# Altium PCB STM32F0_M95.PcbDoc
Units mil, origin at the board's own origin, x right, y up, seen from the top; angles counter-clockwise.
Board outline 3484 x 4455 mil, 2 copper layers (Top Layer, Bottom Layer); 107 components, 75 nets, 364 pads, 74 vias.
Unrouted connection lines stored in the file: 6.
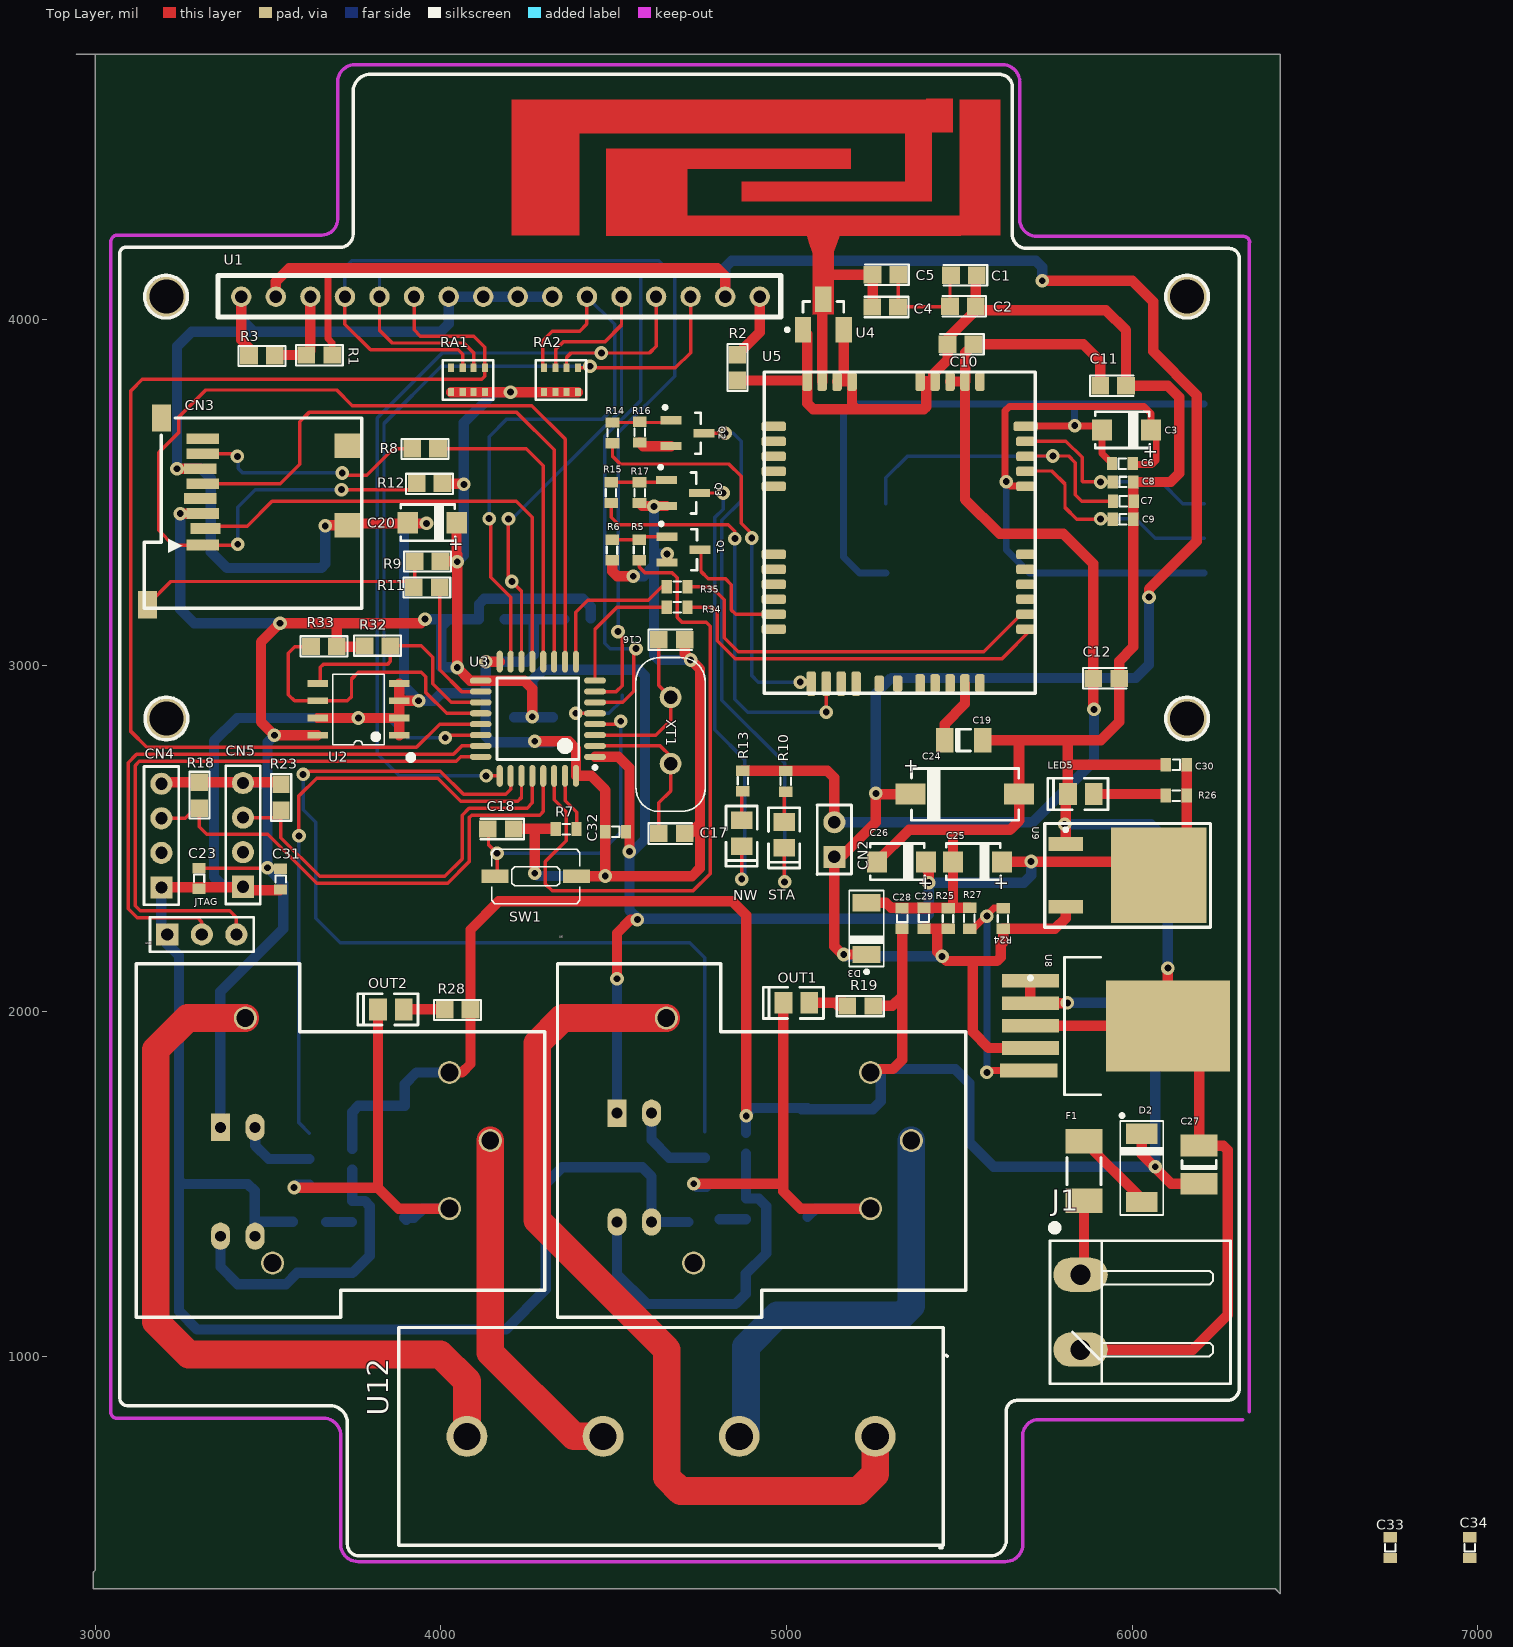
[diagram p0: Top Layer view]
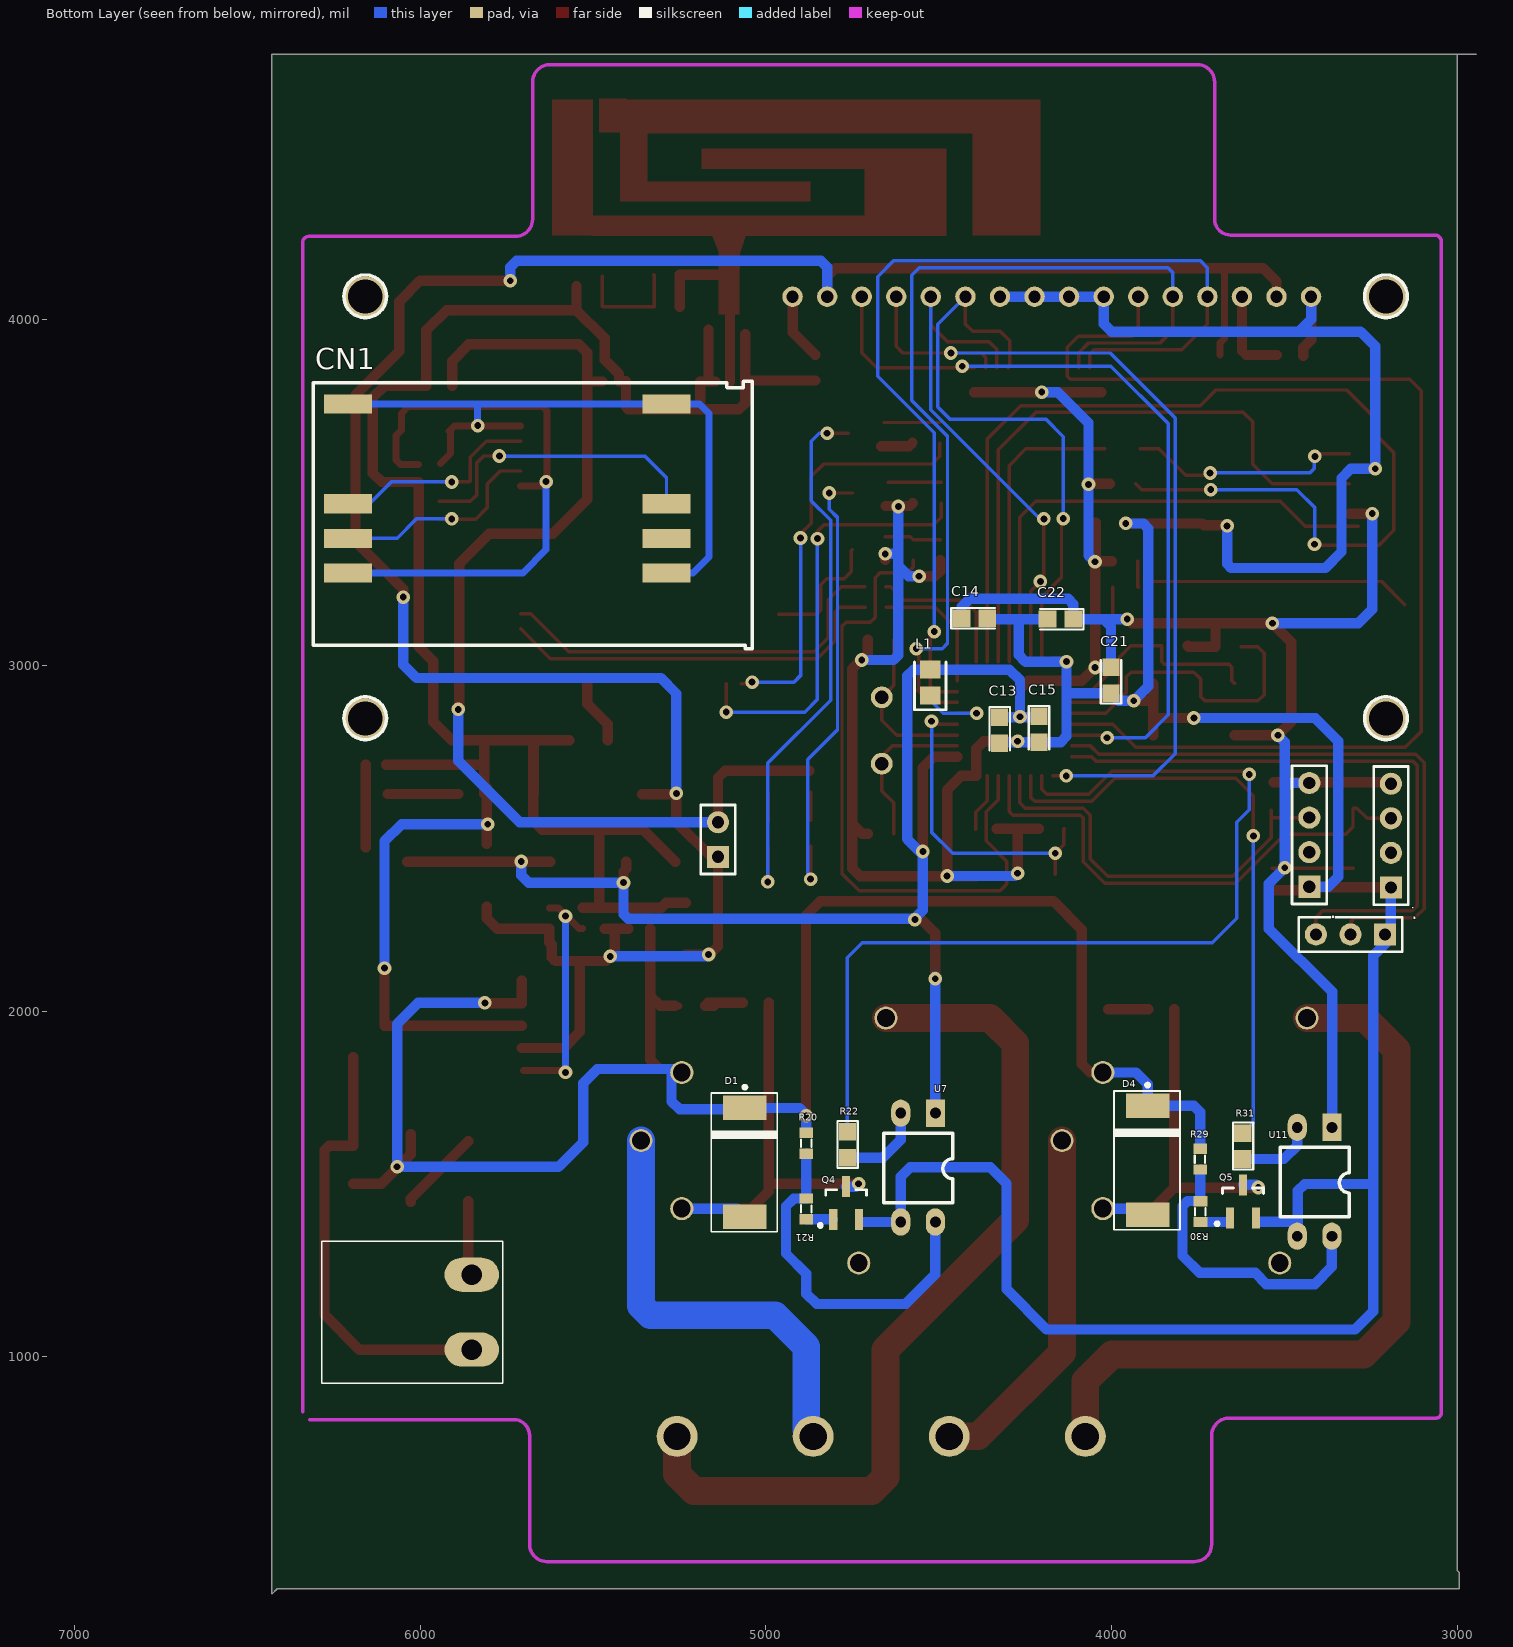
[diagram p1: Bottom Layer view, seen from below]

## Layer stack, top to bottom
Top Layer: signal copper 1.4
Dielectric: dielectric 12.6, FR-4, Dk 4.8
Bottom Layer: signal copper 1.4

## Board outline
3768,4769 2945,4769 3000,4769 3000,423 3000,382 2995,377 2995,329 6414,329 6429,314 6429,699 6429,4769 3773,4769

## Design rules (kind name [scope] priority, off if disabled: settings)
Clearance [All] p1: gap=10
PolygonConnect [All] p1: connectstyle=Relief reliefconductorwidth=10 reliefentries=4 polygonreliefangle="90 Angle"
RoutingVias [All] p1: holewidth=28 width=50 viastyle="Through Hole" minholewidth=28 minwidth=50 maxholewidth=28 maxwidth=50
SilkscreenOverComponentPads [IsPad] p1: minsilkscreentomaskgap=10
SolderMaskExpansion [All] p1: expansion=4
Width "Schematic Width Constraint_9" [InNet('RL_NO0')] p1: maxlimit=90 minlimit=80 preferedwidth=90
Width "Schematic Width Constraint_8" [InNet('RL_CM0')] p2: maxlimit=90 minlimit=80 preferedwidth=90
Width "Schematic Width Constraint_7" [InNet('NetD2_1')] p3: maxlimit=40 minlimit=10 preferedwidth=30
Width "Schematic Width Constraint_6" [InNet('VGSM')] p4: maxlimit=40 minlimit=10 preferedwidth=30
Width "Schematic Width Constraint_5" [InNet('VPP')] p5: maxlimit=40 minlimit=10 preferedwidth=30
Width "Schematic Width Constraint_4" [InNet('VCC')] p6: maxlimit=40 minlimit=10 preferedwidth=30
Width "Schematic Width Constraint_3" [InNet('4V3')] p7: maxlimit=40 minlimit=10 preferedwidth=30
Width "Schematic Width Constraint_2" [InNet('GND')] p8: maxlimit=40 minlimit=10 preferedwidth=30
Width "Schematic Width Constraint_1" [InNet('RL_CM1')] p9: maxlimit=90 minlimit=80 preferedwidth=90
Width "Schematic Width Constraint" [InNet('RL_NO1')] p10: maxlimit=90 minlimit=80 preferedwidth=90
Width [All] p11: maxlimit=30 minlimit=10 preferedwidth=10
27 further rules are at their usual default settings.

## Components (designator, comment, footprint, x,y, rotation, side; value= is the part's Value field where it differs from the comment)
C1 "10p" C2012-0805 5514,4129 r180 top
C2 "33p" C2012-0805 5511,4039 r180 top
C3 "10uF" "Cap SMD Tant 10u" 5984,3681 r180 top
C4 "10p" C2012-0805 5286,4037 r180 top
C5 "33p" C2012-0805 5287,4130 r180 top
C6 "104" C1608-0603 5972,3584 r0 top
C7 "33pF" C1608-0603 5975,3475 r0 top
C8 "33pF" C1608-0603 5974,3531 r0 top
C9 "33pF" C1608-0603 5974,3423 r0 top
C10 "104" C2012-0805 5504,3929 r180 top
C11 "104" C2012-0805 5945,3810 r0 top
C12 "104" C2012-0805 5925,2963 r0 top
C13 "104" C2012-0805 4324,2813 r270 bottom
C14 "104" C2012-0805 4397,3137 r180 bottom
C15 "104" C2012-0805 4210,2816 r270 bottom
C16 "22P" C2012-0805 4668,3075 r0 top
C17 "22P" C2012-0805 4668,2514 r0 top
C18 "104" C2012-0805 4174,2527 r180 top
C19 "2.2uF" C1206 5458,2784 r0 top
C20 "10uF" "Cap SMD Tant 10u" 3975,3413 r180 top
C21 "104" C2012-0805 4002,2957 r90 bottom
C22 "104" C2012-0805 4148,3134 r0 bottom
C23 "104" C1608-0603 3301,2384 r270 top
C24 "10uF" "Cap SMD Tant - 470u" 5516,2628 r0 top
C25 "10uF" "Cap SMD Tant 10u" 5553,2432 r180 top
C26 "10uF" "Cap SMD Tant 10u" 5333,2432 r180 top
C27 "104" C1210 6194,1501 r90 top
C28 "104" C1608-0603 5335,2268 r90 top
C29 "104" C1608-0603 5398,2269 r90 top
C30 "104" C1608-0603 6128,2713 r180 top
C31 "104" C1608-0603 3537,2382 r270 top
C32 "104" C1608-0603 4506,2519 r180 top
C33 "104" C1608-0603 6747,448 r90 top
C34 "104" C1608-0603 6977,448 r90 top
CN1 "Sim Card Holder" "Sim card holder 1" 6209,3268 r0 bottom locked
CN2 "HDR1x2" CON.HDR1X2 5139,2447 r90 top
CN3 "SD Card/MMC" mini_SDCard 3312,3396 r90 top
CN4 "HDR1x4" CON.HDR1X4 3192,2358 r90 top
CN5 "HDR1x4" CON.HDR1X4 3428,2360 r90 top
D1 "FR307" DO-214AB,SMC 5061,1405 r90 bottom
D2 "1N4007" DO-214AA,SMB 6028,1448 r90 top
D3 "Zener" D1208 5232,2314 r270 top
D4 "FR307" DO-214AB,SMC 3896,1411 r90 bottom
F1 "FUSE" FUSE.SMD2010 5861,1451 r90 top
J1 "Domino2" "Domino 2 - Thao roi" 5851,1021 r0 top
JTAG "HDR1x3" CON.HDR1X3 3209,2222 r0 top (schematic designator CN10)
L1 "100uH" L2012-0805 4525,2950.63 r90 bottom
LED5 "LED" LED.SMD0805 5852,2628 r0 top
NW "LED" LED.SMD0805 4871,2515 r90 top (schematic designator LED3)
OUT1 "LED" LED.SMD0805 5029,2024 r0 top (schematic designator LED4)
OUT2 "LED" LED.SMD0805 3856,2005 r0 top (schematic designator LED6)
Q1 "C1815" "SOT23 [C1815]" 4714,3335 r0 top
Q2 "C1815" "SOT23 [C1815]" 4725,3672 r0 top
Q3 "C1815" "SOT23 [C1815]" 4712,3499 r0 top
Q4 "C1815" "SOT23 [C1815]" 4768,1456 r90 bottom
Q5 "C1815" "SOT23 [C1815]" 3620,1461 r90 bottom
R1 "Value" R2012-0805 3649,3898 r180 top
R2 "Value" R2012-0805 4858,3862 r270 top
R3 "Value" R2012-0805 3483,3896 r180 top
R5 "1k" R1608-0603 4574,3334 r90 top
R6 "1k" R1608-0603 4496,3334 r90 top
R7 "10k" R1608-0603 4363,2527 r180 top
R8 "0" R2012-0805 3955,3627 r180 top
R9 "10k" R2012-0805 3962,3301 r180 top
R10 "1k" R1608-0603 4998,2665 r270 top
R11 "1k" R2012-0805 3960,3226 r180 top
R12 "100k" R2012-0805 3968,3526 r180 top
R13 "1k" R1608-0603 4874,2666 r270 top
R14 "1k" R1608-0603 4497,3673 r270 top
R15 "1k" R1608-0603 4493,3500 r90 top
R16 "1k" R1608-0603 4576,3675 r90 top
R17 "1k" R1608-0603 4575,3500 r270 top
R18 "1k" R2012-0805 3302,2625 r270 top
R19 "1k" R2012-0805 5214,2015 r180 top
R20 "10k" R1608-0603 4883,1618 r90 bottom
R21 "10k" R1608-0603 4883,1428 r90 bottom
R22 "220" R2012-0805 4764,1614 r270 bottom
R23 "1k" R2012-0805 3538,2619 r270 top
R24 "120k" R1608-0603 5627,2268 r90 top
R25 "1k" R1608-0603 5468,2268 r90 top
R26 "1k" R1608-0603 6128,2624 r180 top
R27 "51K" R1608-0603 5530,2269 r90 top
R28 "1k" R2012-0805 4049,2004 r180 top
R29 "10k" R1608-0603 3744,1572 r90 bottom
R30 "10k" R1608-0603 3743,1420 r90 bottom
R31 "220" R2012-0805 3620,1610 r270 bottom
R32 "Value" R2012-0805 3817,3057 r0 top
R33 "Value" R2012-0805 3662,3055 r0 top
R34 "22" R1608-0603 4684,3169 r180 top
R35 "22" R1608-0603 4684,3228 r180 top
RA1 "10,100,1K,10K" Res_Array_Chip 4032,3791 r0 top
RA2 "10,100,1K,10K" Res_Array_Chip 4301,3791 r0 top
STA "LED" LED.SMD0805 4994,2510 r90 top (schematic designator LED2)
SW1 "PTS635" TactSwitches.PTS635.SMT 4275,2390 r0 top
U1 "LCD.LCD16x2" "LCD connector" 3423,4067 r0 top locked
U2 "24C04" SOIC8 3880,2798 r180 top
U3 "STM32F030K6T6" QFP80P900X900X245-32N 4281,2846 r180 top
U4 "ANTEN" SOT150P320X110-3N 5107,4015.5 r90 top
U5 "M95" QFN50P400X400X80_HS-15N 4936,2920 r0 top
U6 "RELAY_OMRON_4PIN" PCBComponent_1#1 5519,1114 r90 top locked
U7 "PC817" DIP4 4510,1705 r270 bottom
U8 "MIC29302" DPAK165P1524X238-5N 5614,2167 r270 top
U9 "LM1117-3.3V" TO-252 5802,2393 r270 top
U10 "RELAY_OMRON_4PIN" PCBComponent_1#1 4301,1114 r90 top locked
U11 "PC817" DIP4 3363,1664 r270 bottom
U12 "Component_1" PCBComponent_1#2 5454,455 r90 top
XT1 "8MHz" Crystal.HC49/USxx 4665,2716 r180 top

## Footprints (in the part's own frame and the unit in brackets; to place one, negate y for a bottom-side part, rotate by r counter-clockwise, add the part's x,y. Pads: shape width x height; smd on the part's side, far side on the other; paste and mask are expansions set on the pad)
C1206 [mm] "Chip Capacitor; Body 3.2 x 1.6 mm (LxW typ)"
  rect 1.27x1.8 smd: 1(0,0) 2(2.8,0)
  silkscreen extent 0.87,-0.81 1.9,0.8
C1210 [mm] "Chip Capacitor; Body 3.2 x 2.5 mm (LxW typ)"
  rect 1.6x2.7 smd: 1(0,0) 2(2.8,0)
  silkscreen extent 1.1,-1.25 1.7,1.25
C1608-0603 [mil] "Capacitor Chip 0603 package"
  rect 30x38 smd: 1(-30,0.05) 2(30,0.05)
  silkscreen extent -11,-15 10,15, body extent -28,-17 28,17, height 32
C2012-0805 [mm] "Capacitor Chip 0805 package"
  rect 1.3x1.27 smd: 1(-0.945,-0.007) 2(0.955,-0.007)
  silkscreen extent -1.7,-0.76 1.51,0.75, body extent -0.89,-0.58 0.89,0.58, height 0.79
"Cap SMD Tant 10u" [mm] "CAP TANT 10UF 16V 10% 1210"
  rect 1.5x1.55 smd: 1(-1.8,0) 2(1.8,0)
  silkscreen extent -1.7,-1.4 2.3,1.37, body extent -2.4,-0.91 2.4,0.89, height 1.8
"Cap SMD Tant - 470u" [mm] "CAP TANT 10UF 50V 10% 2917"
  rect 2.2x1.55 smd: 1(-4,0) 2(4,0)
  silkscreen extent -3.91,-1.93 3.96,1.91, body extent -3.76,-1.78 3.84,1.73, height 2.79
CON.HDR1X2 [mil]
  rect 64x64 hole 35.43: 1(-0.44,0.28)
  round 64 hole 35.43: 2(99.56,0.28)
  silkscreen extent -51,-50 150,50, body extent -51,-50 149,50, height 350
CON.HDR1X3 [mil]
  rect 64x64 hole 35.43: 1(0,0)
  round 64 hole 35.43: 2(100,0) 3(200,0)
  silkscreen extent -50,-50 250,50, body extent -50,-50 250,50, height 350
CON.HDR1X4 [mil]
  rect 64x64 hole 35.43: 1(0,0)
  round 64 hole 35.43: 2(100,0) 3(200,0) 4(300,0)
  silkscreen extent -50,-50 350,50, body extent -50,-50 350,50, height 350
Crystal.HC49/USxx [mm] "HC49USxx package"
  rrect100% 1.6x1.6 hole 1: 1(0,0) 2(0,-4.877)
  silkscreen extent -2.55,-7.8 2.55,3.5, body extent -2.29,-7.57 2.3,3.25, height 5.08
D1208 [mil]
  rect 50x80 smd: 1(0,0) 2(150,0)
  silkscreen extent -35,-50 205,50
DIP4 [mm]
  rect 2x1.4 hole 0.8: 1(0,0)
  oval 2x1.4 hole 0.8: 2(0,-2.54) 3(8,-2.54) 4(8,0)
  silkscreen extent 1.48,-3.78 6.57,1.3, body extent -0.17,-3.72 8.19,1.34, height 5.4
DO-214AA,SMB [mm]
  rect 1.5x2.3 smd: 1(0,0) 2(5,0)
  silkscreen extent -0.95,-1.6 6.48,1.57, body extent -0.19,-1.78 5.21,1.82, height 2.3
DO-214AB,SMC [mm]
  rect 1.8x3.2 smd: 1(0,0) 2(8,0)
  silkscreen extent -1.1,-2.39 9.65,2.46, body extent 0.04,-2.97 7.99,2.93, height 2.3
"Domino 2 - Thao roi" [mm]
  oval 4x2.5 hole 1.5: 1(0,5.5) 2(0,0)
  silkscreen extent -2.25,-2.5 11.03,9.2, body extent -1.09,-2.54 11.07,8, height 9
DPAK165P1524X238-5N [mm] "D2-PAK, 5-Pads, Body 8.43x8.39mm (max), IPC Medium Density"
  rect 1x4.2 smd: 1(2,2.336) 2(3.65,2.336) 3(5.3,2.336) 4(6.95,2.336) 5(8.6,2.209)
  rect 6.7x9.1 smd: 3(5.334,12.436)
  silkscreen extent 0.28,2.21 10.38,7.49, body extent 0.31,4.24 10.36,14.91, height 2.38
FUSE.SMD2010 [mm] "2010 Body 5.0 x 2.5 mm (LxW typ)"
  rect 1.8x2.7 smd: 1(0,0) 2(4.4,0)
  silkscreen extent 1.2,-1.25 3.2,1.25
L2012-0805 [mm] "Inductor Chip 0805 package"
  rect 1.3x1.5 smd: 1(-0.945,-0.007) 2(0.955,-0.007)
  silkscreen extent -1.99,-1.16 1.51,1.14, body extent -0.89,-0.58 0.89,0.58, height 0.79
"LCD connector" [mm] "Character LCD 16x2"
  round 1.5 hole 0.9: 1(0,0) 2(2.54,0) 3(5.08,0) 4(7.62,0) 5(10.16,0) 6(12.7,0) 7(15.24,0) 8(17.78,0) 9(20.32,0) 10(22.86,0) 11(25.4,0) 12(27.94,0) 13(30.48,0) 14(33.02,0) 15(35.56,0) 16(38.1,0)
  round 3 hole 2.5 unplated: M1(-5.5,0) M2(69.5,0) M3(-5.5,-31) M4(69.5,-31)
  silkscreen extent -7.1,-32.57 71.07,1.57, body extent -1.27,-1.32 39.37,1.22, height 5.5
LED.SMD0805 [mm]
  rect 1.3x1.6 smd: 1(0.948,0.006) 2(-0.952,0.006)
  silkscreen extent -2.44,-1.14 2,1.16, body extent -1.08,-0.64 1.08,0.64, height 1.14
mini_SDCard [mm]
  rect 0.8x2.4 smd paste+0.127 mask+0.127: 1(-1.21,0) 3(1.1,0) 4(2.2,0.2) 5(3.3,0) 6(4.4,0.2) 7(5.5,0) 8(6.6,0)
  rect 0.8x2.2 smd paste+0.127 mask+0.127: 2(0,-0.2)
  rect 2x1.4 smd paste+0.127 mask+0.127: 9(8.128,3.048) 10(-5.588,4.064)
  rect 1.8x2 smd paste+0.127 mask+0.127: 11(0.254,-10.668) 12(6.096,-10.668)
  silkscreen extent -5.84,-11.68 8.13,4.32, body extent -5.84,-11.63 8.01,4.52, height 1.68
PCBComponent_1#1 [mm]
  round 1.7 hole 1.3: 1(4,20) 2(18,7) 3(8,7) 4(22,22) 5(13,4)
  silkscreen extent 0,0 26,30
PCBComponent_1#2 [mm]
  round 3 hole 2: 1(8,5) 2(8,15) 3(8,25) 4(8,35)
  silkscreen extent 0,0 16,40
QFN50P400X400X80_HS-15N [mm] "QFN, 14-Leads, Body 4.00x4.00mm, Pitch 0.50mm, Thermal Pad 4.00x2.20mm, IPC Medium Density"
  rrect50% 1.8x0.7 smd: 1(0.7,19.6) 2(0.7,18.5) 3(0.7,17.4) 4(0.7,16.3) 5(0.7,15.2) 6(0.7,10.2) 7(0.7,9.1) 8(0.7,8) 9(0.7,6.9) 10(0.7,5.8) 11(0.7,4.7) 31(19.2,19.6)
  rrect50% 0.7x1.8 smd: 12(3.45,0.7) 13(4.55,0.7) 14(5.65,0.7) 15(6.75,0.7)
  rrect50% 0.7x1.4 smd: 16(11.45,0.7) 17(12.55,0.7) 18(13.65,0.7) 19(14.75,0.7) 20(15.85,0.7) 32(15.85,22.9) 33(14.75,22.9) 34(13.65,22.9) 35(12.55,22.9) 36(11.45,22.9) 37(6.45,22.9) 38(5.35,22.9) 39(4.25,22.9) 40(3.15,22.9)
  rrect50% 1.4x0.7 smd: 21(19.2,4.7) 22(19.2,5.8) 24(19.2,8) 25(19.2,9.1) 26(19.2,10.2) 27(19.2,15.2) 28(19.2,16.3) 29(19.2,17.4) 30(19.2,18.5) 223(19.2,6.9)
  rrect50% 0.7x1.2 smd: 41(8.45,0.7) 42(9.8,0.7)
  silkscreen extent 0,0 19.9,23.6
QFP80P900X900X245-32N [mm] "QFP, 32-Leads, Body 7.00x7.00mm, Pitch 0.80mm, IPC Medium Density"
  oval 1.6x0.45 smd: 1(-4.2,2.8) 2(-4.2,2) 3(-4.2,1.2) 4(-4.2,0.4) 5(-4.2,-0.4) 6(-4.2,-1.2) 7(-4.2,-2) 8(-4.2,-2.8) 17(4.2,-2.8) 18(4.2,-2) 19(4.2,-1.2) 20(4.2,-0.4) 21(4.2,0.4) 22(4.2,1.2) 23(4.2,2) 24(4.2,2.8)
  oval 0.45x1.6 smd: 9(-2.8,-4.2) 10(-2,-4.2) 11(-1.2,-4.2) 12(-0.4,-4.2) 13(0.4,-4.2) 14(1.2,-4.2) 15(2,-4.2) 16(2.8,-4.2) 25(2.8,4.2) 26(2,4.2) 27(1.2,4.2) 28(0.4,4.2) 29(-0.4,4.2) 30(-1.2,4.2) 31(-2,4.2) 32(-2.8,4.2)
  silkscreen extent -4.33,-3 3,3.7, body extent -3.5,-3.5 3.5,3.5, height 2.45
R1608-0603 [mil] "Resister Chip 0603 package"
  rect 30x39.37 smd: 1(-30,0.06) 2(30,0.06)
  silkscreen extent -11,-15 10,16, body extent -28,-17 28,17, height 12
R2012-0805 [mm] "Resister Chip 0805 package"
  rect 1.3x1.27 smd: 1(-0.945,-0.007) 2(0.955,-0.007)
  silkscreen extent -1.72,-0.73 1.73,0.75, body extent -0.89,-0.58 0.89,0.58, height 0.41
Res_Array_Chip [mil] "Res Array Chip 4xRes"
  rect 18x24 smd: 1(-2,0) 2(31.5,0) 3(62.99,0) 4(96,0) 5(96,70) 6(62.99,70) 7(31.5,70) 8(-2,70)
  silkscreen extent -26,-22 120,92, body extent -16,3 110,65, height 20
"Sim card holder 1" [mm]
  rect 3.5x1.4 smd: 1(0,0) 2(0,-2.54) 3(0,-5.08) 4(0,-12.4) 5(-23.4,0) 6(-23.4,-2.54) 7(-23.4,-5.08) 8(-23.4,-12.4)
  silkscreen extent -29.72,-14.07 2.54,5.59, body extent -28.21,-12.45 1.79,4.85, height 2.5
SOIC8 [mm]
  rect 1.5x0.5 smd: 1(0,0) 2(0,-1.27) 3(0,-2.54) 4(0,-3.81) 5(6,-3.81) 6(6,-2.54) 7(6,-1.27) 8(6,0)
  silkscreen extent -1.05,-4.5 4.9,1.82, body extent -0.08,-4.39 5.92,0.51, height 1.7
"SOT23 [C1815]" [mm] "SOT23, 3-Leads, Body 3.0x2.6mm (max), Pitch 0.95mm, IPC Medium Density"
  rect 1.55x0.6 smd: 1(-1.5,0.95) 2(-1.5,-0.95) 3(0.925,0)
  silkscreen extent -2.05,-1.5 0.7,2.02, body extent -1.53,-1.5 1.53,1.5, height 1.1
SOT150P320X110-3N [mm] "SOT23, 3-Leads, Body 3.00x3.20mm, Pitch 1.50mm, IPC Medium Density"
  rect 1.85x1.2 smd: 1(1.125,0) 2(-1.125,1.5) 3(-1.125,-1.5)
  silkscreen extent -1.25,-1.5 0.96,2.77, body extent -0.95,-1.5 0.96,1.5, height 1.1
TactSwitches.PTS635.SMT [mil] "3,5 mm Tact Switches, PTS635 Series"
  rect 79x39 smd: 1(-118,0) 2(118,0)
  silkscreen extent -128,-79 128,79, body extent -135,-70 135,70, height 100
TO-252 [mm]
  rect 1x2.54 smd: 1(-2.3,0.152) 3(2.3,0.152)
  rect 7x7 smd: 2(0,7)
  silkscreen extent -3.81,-1.4 3.81,10.79, body extent -3.24,-0.27 3.3,9.67, height 2.44

## Part data
C1 C2 C4 C5 C6 C7 C8 C9 C10 C11 C12 C13 C14 C15 C16 C17 C18 C19 C21 C22 C23 C27 C28 C29 C30 C31 C32 C33 C34: library part Capacitor, "Cap, Ceramic Capacitor, 104, 10V"
C3 C20 C24 C25 C26: library part Cap_Pol, "Cap, Polizared Capacitor 10uF,16V"
CN2: "Conn, Header 1x2"
CN3: "MMC/SD Card"
CN4 CN5: "Conn, Header 1x4"
D1 D4: library part "Diode FR307", "Diode, Fast Recovery, 3A FR307"
D2: library part "Diode 1N4007", "Diode, General Purpose Rectifier, 1Amp,1000V 1N4007"
D3: library part "Diode Zener", "Diode, Zener"
J1: "Conn, 2 pins Domino Header"
JTAG: "Conn, Header 1x3"
L1: library part Inductor, "Ind, 100uH, 20%"
LED5 NW OUT1 OUT2 STA: "Led, Red, SMD0805"
Q1 Q2 Q3 Q4 Q5: "BJT, Audio Freq Amplifier NPN Transistor C1815"
R1 R2 R3 R5 R6 R7 R8 R9 R10 R11 R13 R14 R15 R16 R17 R18 R19 R20 R21 R22 R23 R24 R25 R26 R27 R28 R29 R30 R31 R32 R33 R34 R35: library part Resistor, "Res, 1K,1/10W, 0805, 10%"
R12: library part Resistor, "Resistor"
RA1 RA2: library part "Resister Array Chip 4xR", "Res Array Chip,10%"
SW1: library part "SW TACT MOM SPST", "SWITCH, TACT MOM SPST SMD"
U1: "LCD, 2 line 16 charactors"
U2: library part 24LC04, "IC, 2-wire Serial EEPROM 512K 24C04"
U3 U4 U5 U6 U8 U10: library part Component_1
U7 U11: "Opto, High Density Opto-Coupler PC817"
U9: library part LM1117MP-3.3TR, "IC, 3.3V 800mA Low-Dropout Linear Regulator LM1117-3.3V"
XT1: library part "Xtal 2", "Osc, 4Mhz Crystal"

## Via types
v1: diameter 39.37, hole 19.68, Top Layer to Bottom Layer, tented both sides, 73 vias
v2: diameter 39.37, hole 19.68, Top Layer to Bottom Layer, 1 vias

## Nets (pads, with @x,y where several pads share a name; then routed paths per layer and width w, separated by ;. In a path a pad name is that pad's centre, name@x,y a point inside that pad or via, vN(x,y) a via of type N, cw(c..) or ccw(c..) an arc to the next point about the centre after c; other vN are vias at no path point)
4V3: C24.1 C29.1 CN2.1 D3.2 R1.1 R24.1 R25.1 U1.2 U1.15 U8.4 U9.3 | length 7396.8
  Top Layer w20: 3664,4149 3673.47,4139.53 3673.47,3945.72 3686.19,3933 R1.1
  Top Layer w30: U1.2 3523,4110 3562,4149 3664,4149 4800,4149 4823,4126 U1.15 ; D3.2 v1(5166,2164) 5162,2164 5138.72,2187.28 CN2.1 5158.56,2446.56 5259,2547 v1(5259,2630) 5261,2628 C24.1 ; C29.1 5437,2239 ; R25.1@5466.94,2239 5437,2239 ; U8.4 5585.62,1893.38 5539,1940 5539,2145 ; v1(5740,4113) 6001,4113 6061,4053 6061,3908.57 6187.5,3782.07 6187.5,3359.5 6049,3221 v1(6049,3198) ; U9.3 5807.98,2268.98 5777,2238 R24.1 5626.94,2199.95 5620,2193 5620,2156 5609,2145 5539,2145 ; 5437,2239 5437,2172 v1(5450.5,2158.5) 5464,2145 5539,2145
  Bottom Layer w30: U1.15 4823,4152 4842,4171 5721,4171 5740,4152 v1(5740,4113) ; v1(5166,2164) 5171.5,2158.5 v1(5450.5,2158.5) ; v1(5259,2630) 5259,2919 5304,2964 6011,2964 6049,3002 v1(6049,3198)
DATA1: CN4.3 R18.2 U3.29 | length 1502
  Top Layer w10: CN4.3 3261,2558 3290.39,2587.39 R18.2 3301.72,2533.28 3323,2512 3499.27,2512 3641.27,2370 4020,2370 4082,2432 4082,2559 4090.28,2567.28 4286.28,2567.28 4296.75,2577.75 U3.29
DATA2: CN5.3 R23.2 U3.28 | length 1205.2
  Top Layer w10: CN5.3 3534,2560 R23.2@3537.72,2556.28 ; R23.2 R23.2@3537.72,2556.28 ; U3.28 4265.25,2602.53 4250,2587.28 4081.99,2587.28 4062,2567.28 4062,2440.28 4011.72,2390 3649.55,2390 3537.72,2501.83 R23.2@3537.72,2556.28
GND: C1.1 C2.1 C7.2 C8.2 C9.2 C10.2 C11.2 C12.2 C13.2 C14.2 C15.2 C16.2 C17.2 C18.1 C19.2 C20.2 C21.1 C22.2 C23.2 C24.2 C25.2 C26.2 C27.2 C28.2 C29.2 C30.2 C31.2 C32.2 C33.2 C34.2 CN3.6 CN3.11 CN4.1 CN5.1 D3.1 J1.2 JTAG.1 LED5.2 Q1.2 Q2.2 Q3.2 Q4.2 Q5.2 R2.2 R3.2 R6.1 R7.2 R16.1 R17.2 R25.2 R27.2 SW1.2 U1.1 U1.7 U1.8 U1.9 U1.10 U2.1 U2.2 U2.3 U2.4 U2.7 U3.16 U3.32 U4.2 U4.3 U5.35 U5.36 U5.37 U5.38 U5.40 U7.3 U8.3 U9.1 U11.3 | length 21446.6
  Top Layer w30: CN4.1 3430,2358 3438,2350 3535.05,2350 C31.2 ; v1(3237.23,3569.23) CN3.6 ; U1.1 3423,3942 3445.39,3919.61 R3.2 ; U2.7 v1(3761.89,2848) U2.2 ; v1(3666,3404) 3668,3406 CN3.11 ; CN3.11@3737,3411 v1(3959,3411) ; U2.1 U2.2 ; U2.4 U2.3 ; v1(3936,2898) U2.3 ; v1(4130.65,3011.35) U3.16 ; C18.1 4272,2527.28 ; v1(4272,2399) 4272,2527.28 ; v1(4272,2781) 4370,2781 4391.24,2759.76 U3.32 4435.35,2680.65 4476,2640 C32.2 v1(4476,2391) ; R7.2@4332.67,2527.28 4272,2527.28 ; SW1.2 4727,2390 4750,2413 4750,2542 ; R6.1 4495.94,3273 4511,3257.95 v1(4557,3257.95) ; R17.2 4583.46,3461.6 Q3.2 ; R16.1 4586.35,3634.6 Q2.2 ; Q1.2@4654.94,3306 v1(4654.94,3322.94) ; C17.2 4721.72,2513.72 4750,2542 ; C16.2 4705.61,3034.39 4750,2990 4750,2542 ; R2.2 5057.2,3824.39 U5.40 ; U4.2@5060.02,3959.14 U5.40 ; U5.38 U5.37 5189.94,3753.06 5202,3741 ; 5166.06,3824 U4.3 ; D3.1 5288,2314 5303,2299 C29.2 R27.2 ; C26.2 5355.13,2525 5482.13,2525 ; C28.2@5335.94,2297 5421,2297 ; R25.2@5482.13,2311.19 C25.2 5482.13,2525 ; 5548.19,4097.19 C2.1 C2.1@5548.19,4028.13 ; C19.2 5672,2784 ; 5673.48,2764.48 C24.2 ; U8.3@5705.97,1958.34 U8.3@6102.27,1958.34 ; U9.1 LED5.2@5807.98,2646.48 ; LED5.2 5814.5,2784 ; 5815.45,2712.95 C30.2 ; J1.2 6176,1021 6277,1122 6277,1598 6263.76,1611.24 C27.2 U8.3@6194,1866.61 ; U8.3@6103.61,1957 v1(6103.61,2124.61) ; U2.2 U2.3 ; U5.40 5060.02,3758.98 5078,3741 5202,3741 ; 5202,3741 5398,3741 5404.79,3747.79 5404.79,3822.57 5425,3822.57 5425,3843 5466.39,3884.39 C10.2 5466.39,3946.33 C2.1@5548.19,4028.13 ; 5482.13,2525 5647,2525 5673.48,2551.48 C24.2 ; C2.1@5548.19,4028.13 5923.87,4028.13 5982.61,3969.39 C11.2 6103.28,3809.72 6137,3776 6137,3556 6112.06,3531.05 C8.2 C9.2 6004,3054 5962.61,3012.61 C12.2 5962.61,2837.61 5909,2784 5814.5,2784 ; 5672,2784 5814.5,2784 ; 5672,2784 5672,2629.48 C24.2
  Bottom Layer w30: CN4.1 3192,2211 3243,2160 3243,1511 ; U1.1 3423,4002 3459,3966 ; CN5.1 3373,2360 3344,2389 3344,2781 3411,2848 v1(3761.89,2848) ; Q5.2@3572,1390.94 3472.91,1390.94 3462,1380.04 3462,1480 3442,1500 3254,1500 3243,1511 ; v1(3666,3404) 3666,3294 3654,3282 3382,3282 3335,3329 3335,3542 3307.77,3569.23 v1(3237.23,3569.23) 3237.23,3923.23 3280,3966 3459,3966 ; v1(3959,3411) 3909,3411 3894,3396 3894,2940 v1(3936,2898) 3979.91,2898 C21.1 4130.46,2919.81 ; C22.2 4269,3134.28 ; v1(4272,2399) 4280,2391 v1(4476,2391) ; C13.2@4321.28,2778.39 C15.2 4147.61,2778.39 4130.65,2795.35 v1(4130.65,3011.35) 4249.35,3011.35 4269,3031 4269,3134.28 ; U1.10 U1.9 U1.8 U1.7 4023,3989 4000,3966 3459,3966 ; C14.2@4356.94,3134.28 4269,3134.28 ; v1(4557,3257.95) 4586.94,3257.95 4617,3288 ; v1(4617,3460) 4617,3318 ; v1(4654.94,3322.94) 4621.94,3322.94 4617,3318 ; 4716.69,1390.04 U7.3 4610,1521 4583,1548 4351,1548 4304,1501 4304,1195 4188,1079 3296,1079 3243,1132 3243,1511 ; v1(4723,3016) 4631,3016 4617,3030 4617,3288 ; v1(5805,2541) 6054,2541 6103.61,2491.39 v1(6103.61,2124.61) ; 4617,3288 4617,3318
GSM_PW: R5.1 U3.30 | length 1936.4
  Top Layer w10: U3.30 4328.24,2611.76 4363,2577 4363,2493 4303,2433 4303,2368 4323,2348 4730,2348 4780,2398 4780,3113 4768,3125 4698,3125 4684,3139 4684,3253.84 4668.84,3269 4590,3269 4573.94,3285.05 R5.1
"LCD DATA0": RA2.8 U1.11 U3.15 | length 1739.2
  Top Layer w10: v1@4145,3432 4145,3254.95 4202.26,3197.69 U3.15 ; RA2.8 4295,3865 4295,3939 4323,3967 4402,3967 4423,3988 U1.11
  Bottom Layer w10: v1(4140,3425) 4140,3662 4191,3713 4468.15,3713 4503,3747.85 4503,3987 U1.11
"LCD DATA1": RA2.7 U1.12 U3.14 | length 1560.6
  Top Layer w10: v1(4196,3424) 4196,3253 v2(4206,3243) 4233.76,3215.24 U3.14 ; RA2.7 4332.5,3914.5 4354,3936 4474,3936 4523,3985 U1.12
  Bottom Layer w10: v1(4196,3424) v1@4197,3423 ; v1@4206,3422.57 4523,3739.57 U1.12
"LCD DATA2": RA2.6 U1.13 U3.25 | length 2525.6
  Top Layer w10: v1(4131.35,2680.65) U3.25 ; RA2.6 4363.99,3890.99 4377,3904 v1(4465,3904) 4604,3904 4623,3923 U1.13
  Bottom Layer w10: v1(4131.35,2680.65) 3880.35,2680.65 3816,2745 3816,3716 4004,3904 v1(4465,3904)
"LCD DATA3": RA2.5 U1.14 U3.22 | length 2333.3
  Top Layer w10: v1(4013,2791) 4013,2795.51 4009.76,2798.76 U3.22 ; RA2.5 4679,3861 4723,3905 U1.14
  Bottom Layer w10: v1(4013,2791) 3902,2791 3836,2857 3836,3700 4002,3866 v1(4432,3866)
LCD_E: RA1.5 U1.6 U3.21 | length 3491.7
  Top Layer w10: U1.6 3923,3971 3941,3953 4096,3953 4128,3921 RA1.5 4128,3837 4119,3828 3137,3828 3104,3795 3104,2809 3150,2763 3930,2763 3997.25,2830.25 U3.21
LCD_R/W: RA1.6 U1.5 U3.6 | length 2731.7
  Top Layer w10: U1.5 3823,3970 3860,3933 4067,3933 4094.99,3905.01 RA1.6 ; U3.6 4526.24,2893.24 4558,2925 ; v1@4558,3042 4558,2925 ; 4562,2929 4558,2925
  Bottom Layer w10: U1.5 3823,4137 3837,4151 4556,4151 4578.47,4128.53 4578.47,3766.76 4474.78,3663.06 4474.78,3064.22 4490,3049 v1(4565,3049)
LCD_RS: RA1.7 U1.4 U3.7 | length 2907.9
  Top Layer w10: U1.4 3723,3987 3797,3913 4051,3913 4063.5,3900.5 RA1.7 ; U3.7 4507.74,2924.74 4525,2942 v1@4525,3108
  Bottom Layer w10: U1.4 3723,4151 3743,4171 4631,4171 4677,4125 4677,3837 4513,3673 v1(4513,3098)
MCU_RX: R35.2 U3.9 | length 436.2
  Top Layer w10: U3.9 4391.24,3154.24 4425.94,3188.95 4599.94,3188.95 4638.94,3227.95 R35.2
MCU_TX: R34.2 U3.8 | length 381.1
  Top Layer w10: U3.8 4446.35,3105.35 4509.94,3168.95 R34.2@4652,3168.95
NetC1_2: C1.2 C2.2 C4.1 C5.1 | length 328.6
  Top Layer w10: C5.1 5323.19,4129.28 C4.1 C2.2@5471.39,4037.28 ; C2.2 C1.2@5473.39,4126.28
NetC4_2: C4.2 C5.2 U4.1 U5.39 | length 462.6
  Top Layer w30: U5.39@5104,3821.25 U4.1@5104,4055.79 ; 5113.28,4130.28 C5.2 C4.2@5249.39,4038.28
NetC16_1: C16.1 U3.3 XT1.2 | length 483.4
  Top Layer w10: U3.3 4621.76,2798.76 4665,2842 XT1.2 4630.81,2942.19 C16.1
NetC17_1: C17.1 U3.2 XT1.1 | length 476.6
  Top Layer w10: U3.2 4634.74,2767.26 4665,2737 XT1.1 ; C17.1 4630.81,2602.81 4665,2637 XT1.1 ; XT1.1@4657,2716 XT1.1
NetC18_2: C18.2 SW1.1 U3.4 | length 925.9
  Top Layer w10: C18.2 4138.28,2527.28 4138.28,2481.72 v1(4163,2457) SW1.1@4163,2396 ; U3.4 4512.25,2830.25 v1(4521,2839)
  Bottom Layer w10: v1(4163,2457) 4460,2457 4521,2518 v1(4521,2839)
NetC19_1: C19.1 U5.19 | length 187.9
  Top Layer w30: C19.1 5458,2830 5516.71,2888.71 U5.19
NetD1_1: D1.1 OUT1.2 Q4.3 U6.3 | length 1309
  Top Layer w30: v1(4732,1501) 4991.5,1501 ; OUT1.2 4991.5,1501 ; U6.3 5042.04,1428.96 4991.5,1479.5 4991.5,1501
  Bottom Layer w30: v1(4732,1501) 4740.58,1492.42 Q4.3 ; D1.1 5084.96,1428.96 U6.3
NetD2_1: D2.1 F1.2 | length 245.4
  Top Layer w30: F1.2 6028,1457.23 D2.1
NetD4_1: D4.1 OUT2.2 Q5.3 U10.3 | length 1177.8
  Top Layer w30: v1@3586.5,1489.5 3818.5,1489.5 ; OUT2.2 3818.5,1489.5 ; U10.3 3879.04,1428.96 3818.5,1489.5
  Bottom Layer w30: v1(3576,1490) 3583.42,1497.42 Q5.3 ; D4.1@3900,1396 3894,1402 3922,1402 3948.96,1428.96 U10.3
NetF1_1: F1.1 J1.1 | length 203.5
  Top Layer w30: J1.1@5861,1247.54 F1.1
NetL1_1: L1.1 U3.5 | length 219
  Top Layer w10: v1(4390.75,2861.75) U3.5
  Bottom Layer w10: v1(4390.75,2861.75) 4486.75,2861.75 4524.72,2899.72 L1.1
NetLED2_1: R10.2 STA.1 | length 83.4
  Top Layer w10: STA.1 R10.2@4993.78,2630.72
NetLED2_2: Q2.3 STA.2 | length 1603.7
  Top Layer w10: Q2.3 v1(4823,3672) v1@4837,3672 ; STA.2 4993.78,2375.22 v1(4995,2374)
  Bottom Layer w10: v1(4823,3672) 4846,3672 4869,3649 4869,3476 4813,3420 4813,2900 4995,2718 v1(4995,2374)
NetLED3_1: NW.1 R13.2 | length 80.4
  Top Layer w10: NW.1 R13.2@4870.78,2632.72
NetLED3_2: NW.2 Q3.3 | length 1329.6
  Top Layer w10: Q3.3 v1(4817,3499) ; v1(4870.78,2382.22) NW.2
  Bottom Layer w10: v1(4817,3499) 4817,3452.28 4793,3428.28 4793,2814 4879,2728 4879,2390.44 v1(4870.78,2382.22)
NetLED4_1: OUT1.1 R19.2 | length 127.1
  Top Layer w30: OUT1.1 R19.2@5167.44,2024.22 ; 5150.43,2015.28 R19.2
NetLED5_1: LED5.1 R26.2 | length 204.4
  Top Layer w30: LED5.1 R26.2@6093.72,2628.22
NetLED6_1: OUT2.1 R28.2 | length 117.1
  Top Layer w30: OUT2.1 R28.2@4010.44,2005.22
NetQ1_1: Q1.1 R5.2 R6.2 | length 162.5
  Top Layer w10: R6.2 R5.2 4582.35,3372.4 Q1.1
NetQ2_1: Q2.1 R14.1 R16.2 | length 162.5
  Top Layer w10: R14.1 Q2.1@4659.54,3703
NetQ3_1: Q3.1 R15.2 R17.1 | length 153.6
  Top Layer w10: R15.2 R17.1 Q3.1@4646.54,3530
NetQ4_1: Q4.1 R21.1 | length 76.6
  Bottom Layer w30: Q4.1@4806.46,1398 R21.1
NetQ5_1: Q5.1 R30.1 | length 73.7
  Bottom Layer w30: 3669.35,1390 R30.1
NetR1_2: R1.2 R3.1 U1.3 | length 246.3
  Top Layer w30: R3.1@3522.19,3898.28 R1.2 ; R1.2@3623,3909.89 U1.3
NetR2_1: R2.1 U1.16 | length 194.8
  Top Layer w30: R2.1 4923,3964.46 U1.16
NetR7_1: R7.1 U3.31 | length 167.5
  Top Layer w10: U3.31 4359.74,2609.26 4393,2576 R7.1
NetR14_2: R14.2 U5.12 | length 1204.4
  Top Layer w10: R14.2 4497.06,3604.95 4519,3583 4833,3583 4869,3547 4869,3412 4900,3381 v1(4900,3369) ; v1(5040,2952) 5044.44,2947.56 U5.12
  Bottom Layer w10: v1(4900,3369) 4900,2971 4919,2952 v1(5040,2952)
NetR15_1: R15.1 U5.13 | length 1263.9
  Top Layer w10: R15.1 4492.94,3429.05 4515,3407 4832,3407 4851,3388 v1(4851,3367) ; v1(5115.13,2865.13) U5.13
  Bottom Layer w10: v1(4851,3367) 4851,2902 4888,2865 v1@5115.13,2865
NetR20_1: R20.1 R21.2 U7.4 | length 1047.6
  Bottom Layer w30: U7.4 4510,1239 4596,1153 4853,1153 4883,1183 4883,1240 4942,1299 4942,1436 4920,1458 R21.2 R20.1
NetR22_2: R22.2 U7.2 | length 252.7
  Bottom Layer w30: U7.2 4610,1628 4661.61,1576.39 R22.2
NetR24_2: R24.2 R27.1 U8.5 | length 696.7
  Top Layer w20: R27.1 5541,2239 5600,2298 R24.2 ; v1(5580,1823) 5585.42,1828.42 U8.5
  Bottom Layer w20: v1(5580,1823) v1(5580,2275)
NetR29_1: R29.1 R30.2 U11.4 | length 866.9
  Bottom Layer w30: U11.4 3363,1260 3412.5,1210.5 3552.5,1210.5 3585,1243 3745,1243 3795,1293 3795,1436 3780,1451 3744.05,1451 R29.1
NetR31_2: R31.2 U11.2 | length 226
  Bottom Layer w30: U11.2 3463,1611.39 3502,1572.39 R31.2
OUT1: R22.1 U3.26 | length 2769
  Top Layer w10: v1@3614,2694 3999.28,2694 4066.01,2627.28 4188,2627.28 4202.26,2641.54 U3.26
  Bottom Layer w10: v1(3602,2685) 3602,2583 3638,2547 3638,2269 3709,2198 4721,2198 4764.28,2154.72 R22.1
OUT2: R31.1 U3.27 | length 1747.9
  Top Layer w10: v1(3590,2507) 3590,2623 3641,2674 3991,2674 4057.72,2607.28 4223,2607.28 4233.76,2618.03 U3.27
  Bottom Layer w10: v1(3590,2507) 3590,1677.46 R31.1
PWRKEY: Q1.3 U5.10 | length 368.9
  Top Layer w10: Q1.3 4753,3332.42 4753,3272 4774,3251 4824,3251 4841,3234 4841,3160.56 4853.21,3148.35 U5.10
RL_CM0: U6.4 U12.1 | length 2563.4
  Top Layer w80: U6.4 4352.14,1980.14 4279,1907 4279,1396 4654,1021 4654,652 4694,612 5208,612 5257.15,661.15 U12.1
RL_CM1: U10.4 U12.4 | length 2214.3
  Top Layer w80: U10.4 3268.14,1980.14 3176,1888 3176,1102 3271,1007 3999,1007 4076.05,929.95 U12.4
RL_NO0: U6.5 U12.2 | length 1273
  Bottom Layer w80: U12.2 4883,789.51 4883,1029 4974,1120 5334,1120 5361.52,1147.52 U6.5
RL_NO1: U10.5 U12.3 | length 1040.1
  Top Layer w80: U10.5 4143.52,1012.29 4385.85,769.96 U12.3
RX_GSM: R34.1 U5.21 | length 1143.9
  Top Layer w10: R34.1@4712,3168.95 4786.06,3168.95 4800,3155 4800,3072 4852,3020 5623.87,3020 U5.21@5709.91,3106.04
SCL: R33.1 U2.6 U3.20 | length 897.8
  Top Layer w10: R33.1 3577.72,3054.72 3559,3036 3559,2916 3577,2898 U2.6 3730,2898 3742,2910 3742,2961 3762,2981 3943.19,2981 3957.19,2967 3957.19,2921.81 4017.25,2861.75 U3.20
SD_CK: CN3.5 U3.11 | length 1830.9
  Top Layer w10: CN3.5 3535.92,3525.92 3592,3582 3592,3705 3619,3732 4220,3732 4328.24,3623.76 U3.11
SD_DT: R11.1 U3.18 | length 383
  Top Layer w10: R11.1 3997.19,2987.81 4060.26,2924.74 U3.18
SD_MISO: CN3.7 R8.2 | length 693.9
  Top Layer w10: CN3.7 3404.46,3612.54 v1(3412,3605) ; v1@3711,3550 3786,3550 3863.28,3627.28 R8.2
  Bottom Layer w10: v1@3414,3616 3414,3570 3427,3557 v1(3715,3557)
SD_MOSI: CN3.2 U3.13 | length 1445.8
  Top Layer w10: CN3.2@3285.87,3403 3440,3403 3512,3475 4219,3475 4265.25,3428.75 U3.13
SD_WP: CN3.10 R9.2 R11.2 | length 857.2
  Top Layer w10: CN3.10 3219,3243 R11.2@3905.66,3243 ; R11.2 3924.39,3228.28 R9.2
SDA: R32.2 U2.5 U3.19 | length 678.9
  Top Layer w10: U2.5 3652,2956.22 3652,2995 3660,3003 3846,3003 3854.61,3011.61 R32.2 3944.28,3056.72 3977.19,3023.81 3977.19,2946.81 4030.76,2893.24 U3.19
SIM_CLK: C8.1 CN1.3 U5.30 | length 649.6
  Top Layer w10: U5.30@5709.91,3649.35 5808.65,3649.35 5856,3602 5856,3533 5857.94,3531.05 C8.1
  Bottom Layer w10: v1(5909,3531) 6084,3531 6147,3468 CN1.3
SIM_DATA: C7.1 CN1.7 U5.29 | length 928
  Top Layer w10: U5.29@5709.91,3606.04 5816.96,3606.04 5836,3587 5836,3494 5854.94,3475.05 C7.1
  Bottom Layer w10: CN1.7 5287.74,3542.74 5351,3606 v1(5771,3606)
SIM_GND: C3.2 C6.1 CN1.4 CN1.5 CN1.8 U5.31 | length 1997.4
  Top Layer w20: U5.31@5709.91,3692.65 5901.48,3692.65 C3.2 ; C3.2@5916.53,3677.61 C3.2 ; C6.1 5913.13,3612.92 C3.2
  Bottom Layer w20: CN1.5 5211,3268 5165,3314 5165,3729 5192.19,3756.19 CN1.8 5834,3756.19 ; v1@5833,3693 v1(5834,3694) 5834,3756.19 ; CN1.4 5834,3756.19
SIM_RST: C9.1 CN1.2 U5.28 | length 660
  Top Layer w10: U5.28@5709.91,3562.73 5768.27,3562.73 5806,3525 5806,3457 5839.94,3423.05 C9.1
  Bottom Layer w10: v1@5904,3424 6011,3424 6067,3368 CN1.2
  other v1: 5909,3424
SIM_VCC: C3.1 C6.2 CN1.1 U5.27 | length 1734.8
  Top Layer w10: C6.2 C6.2@6005.06,3581
  Top Layer w20: U5.27@5709.91,3519.43 5647.57,3519.43 5633,3534 5633,3737 5645,3749 6035,3749 6054.87,3729.13 C3.1 6070,3665.87 6070,3594 6057,3581 C6.2@6005.06,3581
  Bottom Layer w20: v1(5636,3532) 5636,3335 5703,3268 CN1.1
SPI1_MISO: R8.1 U3.12 | length 863.8
  Top Layer w10: 4020,3627 4248,3627 4296.75,3578.25 U3.12
SPI1_NSS: CN3.1 R12.2 U3.10 | length 3105.1
  Top Layer w10: v1(3413,3351) 3410.36,3348.36 CN3.1 3226.64,3348.36 3184,3391 3184,3616.12 3241.88,3674 3241.88,3718.88 3320,3797 3699,3797 3744,3752 4263,3752 4359.74,3655.26 U3.10 ; v1(3713,3509) 3913.11,3509 R12.2
  Bottom Layer w10: v1(3413,3351) 3413,3458 3464,3509 v1(3713,3509)
SWCLK: JTAG.3 U3.24 | length 1769
  Top Layer w10: JTAG.3 3409,2271 3390,2290 3131,2290 3116,2305 3116,2710.72 3128.28,2723 3714,2723 ; 3717,2723 4045.28,2723 4058.28,2736 4115.41,2736 U3.24
SWDIO: JTAG.2 U3.23 | length 1727
  Top Layer w10: JTAG.2 3309,2258 3297,2270 3122.72,2270 3096,2296.72 3096,2719 3120,2743 4037,2743 4061.26,2767.26 U3.23
TX_GSM: R35.1 U5.22 | length 1183.3
  Top Layer w10: R35.1 4782.06,3227.95 4820,3190 4820,3080.28 4860.28,3040 5571,3040 5680.35,3149.35 U5.22@5709.91,3149.35
VCC: C13.1 C14.1 C15.1 C20.1 C21.2 C22.1 C23.1 C25.1 C26.1 C30.1 C31.1 C32.1 C33.1 C34.1 CN3.3 CN4.4 CN5.4 L1.2 R9.1 R12.1 R18.1 R23.1 R26.1 R32.1 R33.2 RA1.1 RA1.2 RA1.3 RA1.4 RA2.1 RA2.2 RA2.3 RA2.4 U2.8 U3.1 U3.17 U7.1 U9.2 U11.1 | length 10405.7
  Top Layer w10: C23.1 3302.05,2413 C31.1@3536.05,2413
  Top Layer w30: CN4.4@3196.19,2662.19 R18.1 R23.1@3531.72,2662.19 ; v1(3246.31,3439.31) CN3.3 ; U2.8 v1(3519,2798) 3480,2837 3480,3067 v1(3535,3122) 3690,3122 ; R32.1 3777.81,3054.72 R33.2 3699.61,3112.39 3690,3122 ; v1(3954.72,3134.28) 3942.45,3122 3690,3122 ; R9.1 4040.28,3301.28 4045.87,3306.87 4045.87,3323 ; R12.1 4064.72,3526.28 v1(4067,3524) ; RA1.1 RA1.2 RA1.3 RA1.4 v1(4202,3791) RA2.1 RA2.2 RA2.3 RA2.4 ; C20.1 4045.87,3323 ; v1(4265,2852) 4265,2933 4241.76,2956.24 U3.17 4085.76,2956.24 v1(4047.78,2994.22) 4047.78,3321.09 4045.87,3323 ; U3.1 4514.24,2735.76 4546,2704 v1(4546,2462) ; v1(4510,2094) 4510,2226 4549,2265 v1(4569,2265) ; C26.1 5403.87,2412.13 5412,2404 v1(5412,2372) ; C25.1 U9.2@6038.59,2432 ; U9.2@6158,2473.41 R26.1 C30.1
  Bottom Layer w30: v1(3246.31,3439.31) 3246.31,3162.69 3287,3122 v1(3535,3122) ; U11.1@3362,1695 3362,2056 3545,2239 3545,2369 v1(3499,2415) 3499,2647 ; CN5.4 3486,2660 3499,2647 ; v1(3519,2798) 3499,2778 3499,2647 ; v1(3954.72,3134.28) 4023.28,3134.28 ; v1@4047.78,2994.61 C21.2 4001.72,3112.72 4023.28,3134.28 ; v1(4048,3300) 4067,3319 v1(4067,3524) 4067,3702 4156,3791 v1(4202,3791) ; C15.1@4213.28,2850.19 C13.1 ; v1(4265,2852) 4265,2957 4296.24,2988.24 L1.2 4572.76,2988.24 4591,2970 4591,2498 v1@4546,2453 ; C14.1 4434.19,3169.81 4411,3193 4126,3193 4110.81,3177.81 C22.1 4023.28,3134.28 ; U7.1 v1(4510,2094) v1@4510,2100 ; v1(4546,2462) v1@4546,2453 ; v1(5412,2372) 5412,2280 5399,2267 4571,2267 4546,2292 v1@4546,2453 ; v1@5420,2371.87 5686.87,2371.87 5708,2393 v1(5708,2433)
VGSM: C10.1 C11.1 C12.1 CN2.2 R10.1 R13.1 U5.33 U5.34 | length 3206.9
  Top Layer w30: R13.1 5118,2696 5138.72,2675.28 CN2.2 ; U5.34 U5.33 ; v1@5887.81,2870.81 C12.1 5887.81,3294.19 5801,3381 5617,3381 5516.71,3481.29 U5.33 ; C11.1 5907.81,3880.81 5859.35,3929.28 C10.1 5516.98,3905.06 5516.98,3821.84 U5.33
  Bottom Layer w30: CN2.2 5712.56,2546.56 5890,2724 v1(5890,2873)
VPP: C27.1 C28.1 D1.2 D2.2 D4.2 R19.1 R20.2 R28.1 R29.2 U6.2 U8.1 U8.2 U10.2 | length 5610.8
  Top Layer w20: R19.1 R19.1@5264,2015.28
  Top Layer w30: U10.2 4061.66,1822.66 4086.19,1847.19 R28.1 4086.19,2236.19 4168,2318 4843,2318 4884,2277 v1(4884,1697) ; R19.1@5264,2015.28 5306.28,2015.28 5334.94,2043.94 ; U6.2@5273.41,1832.66 5307.66,1832.66 5334.94,1859.94 5334.94,2043.94 ; C28.1 5334.94,2043.94 ; U8.1 U8.2 v1@5812.3,2023.3 ; D2.2 6028,1586 6113,1501 C27.1
  Bottom Layer w30: R29.2 3744.05,1708 3762.01,1725.96 D4.2 3896,1788.66 3930,1822.66 U10.2 ; R20.2 4883.06,1700.06 4902.96,1719.96 D1.2 ; D1.2@5045,1715.96 5249.96,1715.96 5273.41,1739.41 5273.41,1832.66 5488.34,1832.66 5529,1792 5529,1621 5600,1550 v1(6067,1550) 6067,1963 6006,2024 v1(5813,2024)
pads on no net: CN1.6 CN3.4 CN3.8 CN3.9 CN3.12 CN4.2 CN5.2 RA1.8 U1.M1 U1.M2 U1.M3 U1.M4 U5.1 U5.2 U5.3 U5.4 U5.5 U5.6 U5.7 U5.8 U5.9 U5.11 U5.14 U5.15 U5.16 U5.17 U5.18 U5.20 U5.24 U5.25 U5.26 U5.32 U5.41 U5.42 U5.223 U6.1 U10.1

## Keep-outs
Keep-Out Layer:
  lines w10: 6320.44,818.66 5729.89,818.66 ccw(c5729.89,772.54) 5683.77,772.54 5683.77,457.58 cw(c5633.77,457.58) 5633.77,407.58 3760.79,407.58 cw(c3760.79,457.58) 3710.79,457.58 3710.79,772.54 ccw(c3660.79,772.54) 3660.79,822.54 3062.84,822.54 cw(c3062.84,839.57) 3045.81,839.57 3045.81,4225.4 cw(c3065.5,4225.54) 3065.35,4245.22 3655.9,4245.22 ccw(c3655.9,4291.34) 3702.02,4291.34 3702.02,4688.31 cw(c3752.02,4688.31) 3752.02,4738.31 5625,4738.31 cw(c5625,4688.31) 5675,4688.31 5675,4291.34 ccw(c5725,4291.34) 5725,4241.34 6322.95,4241.34 ; 6323.08,4241.34 cw(c6323.08,4224.31) 6340.1,4224.31 ; 6339.58,841 6339.58,4223.44

## Other copper
Top Layer:
  rectangle: 4478.38,4437 5187.04,4496.06
  rectangle: 4478.38,4242.94 4714.6,4439.8
  rectangle: 4713.6,4243 5505,4302.06
  rectangle: 5500.74,4243.3 5618.85,4637
  rectangle: 4870.82,4341.72 5422,4400.78
  rectangle: 5343.26,4400.78 5422,4637
  rectangle: 4205.15,4243.3 4402,4637
  rectangle: 4402,4538.57 5346.88,4637
  rectangle: 5404,4541.57 5482.74,4640
  region net NetC4_2: 5057.63,4251.8 5066.37,4222.2 5076.37,4192.2 5077,4101 5077,4015 5137,4016 5137,4197 5157.63,4251.8

## Silkscreen, mask and mechanical layers (free items; w line width, h text height)
Top Overlay:
  lines w10: 3088.81,4209.96 ccw(c3088.81,4193.15) 3072,4193 3072,4146 3072,880 ccw(c3093,880) 3093,859 ; 3089,4210 3709.17,4210 ccw(c3709.17,4247.55) 3746.72,4247.55 3746.72,4655.55 cw(c3796.58,4660.13) 3792,4710 5620.55,4710 ; 3097.49,859 3679.79,859 cw(c3679.79,809) 3729.79,809 3730,458.06 ccw(c3764.01,458.06) 3764.01,424.04 3777.96,424.04 5590.04,424.04 ccw(c5590.04,470.05) 5636.05,470.05 5636.05,843.05 cw(c5667.04,843.05) 5667.04,874.04 6277,874.04 ; 5443,447 5451,447 ; 5463,1005 5466,1002 ; 5617.55,4709.85 cw(c5617.55,4674) 5653.4,4674 5653.4,4248.1 ccw(c5695,4248.1) 5695,4206.5 6281.5,4206.5 cw(c6281.5,4178) 6310,4178 6310,909.12 cw(c6275.18,908.86) 6275.43,874.04

## Text inside footprints (layer, text, board x,y; h text height)
C3: Top Overlay "+" at 6076,3635 h39.37 r180
C20: Top Overlay "+" at 4067,3367 h39.37 r180
C24: Top Overlay "+" at 5338,2693 h39.37
C25: Top Overlay "+" at 5645,2386 h39.37 r180
C26: Top Overlay "+" at 5425,2386 h39.37 r180